# EAGLE board CT_schematic (EAGLE 7.6.0)

Size 100 x 80 mm. Coordinates in mm from the lower left corner, seen from the top.
Outline: 0,0 100,0 100,80 0,80 0,0
Copper layers (1*16): Top 0.035mm / dielectric 1.5mm / Bottom 0.035mm
Design rules "default": minimum track width 10mil, minimum drill 24mil, track to track 8mil, track to pad 8mil, pad to pad 8mil, via to via 8mil, smd to smd 8mil, copper to edge 40mil, drill to drill 8mil, minimum pad ring 10mil, minimum via ring 8mil, stop-mask expansion 4mil, vias tented up to drill 0mil, thermal gap 10mil

## Footprints (pad centres in the part's own frame; a part is rotated, then mirrored left to right if it is on the bottom)
C0603 = smd 0.8 x 0.8: 1 -0.762,0; 2 0.762,0
C0402 = smd 0.5 x 0.5: 1 -0.508,0; 2 0.508,0
C0805 = smd 1.2 x 1.3: 1 -1.016,0; 2 1.016,0
C1206 = smd 1.3 x 1.6: 1 -1.524,0; 2 1.524,0
C1210 = smd 1.2 x 2.5: 1 -1.524,0; 2 1.524,0
EXV-9H = smd 3.505 x 1.676: 1 -2.857,0; 2 2.857,0
L0603 = smd 0.8 x 0.8: 1 -0.762,0; 2 0.762,0
PJ-037B_PACKAGE = drill 3.7 square: 1 12,0 | drill 3.2 square: 2 6,0
R0603 = smd 0.8 x 0.8: 1 -0.762,0; 2 0.762,0
UFQFPN48 = smd 0.559 x 0.305: 1 -3.375,2.751; 2 -3.375,2.251; 3 -3.375,1.75; 4 -3.375,1.25; 5 -3.375,0.75; 6 -3.375,0.25; 7 -3.375,-0.25; 8 -3.375,-0.75; 9 -3.375,-1.25; 10 -3.375,-1.75; 11 -3.375,-2.251; 12 -3.375,-2.751; 25 3.375,-2.751; 26 3.375,-2.251; 27 3.375,-1.75; 28 3.375,-1.25; 29 3.375,-0.75; 30 3.375,-0.25; 31 3.375,0.25; 32 3.375,0.75; 33 3.375,1.25; 34 3.375,1.75; 35 3.375,2.251; 36 3.375,2.751 | smd 0.305 x 0.559: 13 -2.751,-3.375; 14 -2.251,-3.375; 15 -1.75,-3.375; 16 -1.25,-3.375; 17 -0.75,-3.375; 18 -0.25,-3.375; 19 0.25,-3.375; 20 0.75,-3.375; 21 1.25,-3.375; 22 1.75,-3.375; 23 2.251,-3.375; 24 2.751,-3.375; 37 2.751,3.375; 38 2.251,3.375; 39 1.75,3.375; 40 1.25,3.375; 41 0.75,3.375; 42 0.25,3.375; 43 -0.25,3.375; 44 -0.75,3.375; 45 -1.25,3.375; 46 -1.75,3.375; 47 -2.251,3.375; 48 -2.751,3.375 | smd 5.588 x 5.588: 49 0,0
M41T65_QFN-16 = smd 0.775 x 0.305: 1 -1.387,0.75; 2 -1.387,0.25; 3 -1.387,-0.25; 4 -1.387,-0.75; 9 1.387,-0.75; 10 1.387,-0.25; 11 1.387,0.25; 12 1.387,0.75 | smd 0.305 x 0.775: 5 -0.75,-1.387; 6 -0.25,-1.387; 7 0.25,-1.387; 8 0.75,-1.387; 13 0.75,1.387; 14 0.25,1.387; 15 -0.25,1.387; 16 -0.75,1.387 | smd 1.6 x 1.6: 17 0,0
SOIC-8 = smd 1.6 x 0.6: 1 -2.7,1.905 | smd 1.55 x 0.6: 2 -2.7,0.635; 3 -2.7,-0.635; 4 -2.7,-1.905; 5 2.7,-1.905; 6 2.7,-0.635; 7 2.7,0.635; 8 2.7,1.905
QFN-32 = smd 0.6 x 0.3: 1 -2.3,1.75; 2 -2.3,1.25; 3 -2.3,0.75; 4 -2.3,0.25; 5 -2.3,-0.25; 6 -2.3,-0.75; 7 -2.3,-1.25; 8 -2.3,-1.75; 17 2.3,-1.75; 18 2.3,-1.25; 19 2.3,-0.75; 20 2.3,-0.25; 21 2.3,0.25; 22 2.3,0.75; 23 2.3,1.25; 24 2.3,1.75 | smd 0.3 x 0.6: 9 -1.75,-2.3; 10 -1.25,-2.3; 11 -0.75,-2.3; 12 -0.25,-2.3; 13 0.25,-2.3; 14 0.75,-2.3; 15 1.25,-2.3; 16 1.75,-2.3; 25 1.75,2.3; 26 1.25,2.3; 27 0.75,2.3; 28 0.25,2.3; 29 -0.25,2.3; 30 -0.75,2.3; 31 -1.25,2.3; 32 -1.75,2.3 | smd 3.2 x 3.2: EXP 0,0
SJ-43515TS-SMT-TR = smd 2.2 x 3: 1 0.6,-7.4; 4 3.4,-7.4 | smd 3 x 3: 2 12.8,-7.4; 5 17,-3 | smd 2 x 3: 3 5.3,0; 6 2.5,0 | drill 1.8: P$7 4.5,-3.69; P$8 11.54,-3.69
WM-64PC = drill 0.6 pad 1: 1 -1,0.95; 2 -1,-0.95
SMD-8 = smd 0.72 x 0.6: 1 -1.45,-0.7; 2 -0.485,-0.7; 3 0.485,-0.7; 4 1.455,-0.7; 5 1.455,0.7; 6 0.485,0.7; 7 -0.485,0.7; 8 -1.455,0.7
QFN65P400X400X100-17N = smd 1.016 x 0.356: 1 -1.803,0.965; 2 -1.803,0.33; 3 -1.803,-0.33; 4 -1.803,-0.965; 9 1.803,-0.965; 10 1.803,-0.33; 11 1.803,0.33; 12 1.803,0.965 | smd 0.356 x 1.016: 5 -0.965,-1.803; 6 -0.33,-1.803; 7 0.33,-1.803; 8 0.965,-1.803; 13 0.965,1.803; 14 0.33,1.803; 15 -0.33,1.803; 16 -0.965,1.803 | smd 2.108 x 2.108: 17 0,0
HTSS-105-01-G-D = drill 1 pad 1.8 square: 1 0,0 | drill 1 pad 1.8: 2 0,2.54; 3 2.54,0; 4 2.54,2.54; 5 5.08,0; 6 5.08,2.54; 7 7.62,0; 8 7.62,2.54; 9 10.16,0; 10 10.16,2.54
ABS07-32.768KHZ-7-T = smd 1.1 x 2.4: 1 -2.5,0; 2 0,0
ABLS-25.000MHZ-B2F-T = smd 5.6 x 2.8: 1 -3.81,0; 2 5.69,0
ASEK = smd 1.4 x 1: 1 -1.1,-0.8; 2 1.1,-0.8; 3 1.1,0.8; 4 -1.1,0.8
ASFL1 = smd 1.7 x 1.5: 1 -1.27,-1.1; 2 1.27,-1.1; 3 1.27,1.1; 4 -1.27,1.1
WSON-8 = smd 0.3 x 0.6: 1 -0.75,0; 2 0.05,0; 3 0.85,0; 4 1.65,0; 5 1.65,3.8; 6 0.85,3.8; 7 0.05,3.8; 8 -0.75,3.8 | smd 3 x 2.6: PAD 0.45,1.9
SON-6 = smd 0.55 x 0.3: 1 -0.355,0.5 | smd 0.52 x 0.3: 2 -0.37,0; 3 -0.37,-0.5; 4 0.37,-0.5; 5 0.37,0; 6 0.37,0.5
SW_4-1437565-2 = smd 1.4 x 2.1: 1 -2.23,4.55; 2 -2.23,-4.55; 3 2.23,4.55; 4 2.23,-4.55
LGM67K-G1J2-24-Z = smd 0.8 x 1.4: A -2,0; C 0,0
NC7SZ125M5X = smd 1.3 x 0.7: 1 -1.3,0.95; 2 -1.3,0; 3 -1.3,-0.95; 4 1.3,-0.95; 5 1.3,0.95

## Placement (x,y rotation side)
C1  1e-06  [C0603]  -52.07,78.74 0 top  (outside the outline)
C2  1e-07  [C0603]  -55.88,78.74 0 top  (outside the outline)
C3  1e-07  [C0603]  -59.69,78.74 0 top  (outside the outline)
C4  1e-07  [C0603]  -63.5,78.74 0 top  (outside the outline)
C5  1e-07  [C0603]  -67.31,78.74 0 top  (outside the outline)
C6  1e-07  [C0603]  -71.12,78.74 0 top  (outside the outline)
C7  4.7e-06  [C0603]  -44.45,78.74 0 top  (outside the outline)
C8  2.2e-06  [C0603]  -48.26,78.74 0 top  (outside the outline)
C9  1e-08  [C0603]  -74.93,78.74 0 top  (outside the outline)
C10  1e-06  [C0603]  -78.74,78.74 0 top  (outside the outline)
C11  1e-11  [C0402]  -49.53,88.9 0 top  (outside the outline)
C12  1e-11  [C0402]  -53.34,88.9 0 top  (outside the outline)
C13  4.7e-06  [C0805]  -27.94,72.39 0 top  (outside the outline)
C14  1e-08  [C0402]  -57.15,88.9 0 top  (outside the outline)
C15  1e-06  [C0603]  -82.55,78.74 0 top  (outside the outline)
C16  1e-06  [C0603]  -15.24,83.82 0 top  (outside the outline)
C17  1e-06  [C0603]  -19.05,83.82 0 top  (outside the outline)
C18  1e-06  [C0603]  -22.86,83.82 0 top  (outside the outline)
C19  1e-06  [C0603]  -26.67,83.82 0 top  (outside the outline)
C20  1e-06  [C0603]  -30.48,83.82 0 top  (outside the outline)
C21  1e-06  [C0603]  -34.29,83.82 0 top  (outside the outline)
C22  1e-07  [C0402]  -60.96,88.9 0 top  (outside the outline)
C23  1e-07  [C0402]  -64.77,88.9 0 top  (outside the outline)
C24  1e-07  [C0402]  -68.58,88.9 0 top  (outside the outline)
C25  1e-07  [C0402]  -72.39,88.9 0 top  (outside the outline)
C26  1e-06  [C0603]  -38.1,83.82 0 top  (outside the outline)
C27  1e-06  [C0603]  -41.91,83.82 0 top  (outside the outline)
C28  1e-06  [C0603]  -45.72,83.82 0 top  (outside the outline)
C29  1e-07  [C0402]  -76.2,88.9 0 top  (outside the outline)
C30  1e-06  [C0603]  -49.53,83.82 0 top  (outside the outline)
C31  1e-08  [C0402]  -80.01,88.9 0 top  (outside the outline)
C32  1e-08  [C0402]  -83.82,88.9 0 top  (outside the outline)
C33  1e-08  [C0402]  -15.24,93.98 0 top  (outside the outline)
C34  1e-05  [C1206]  -76.2,64.77 0 top  (outside the outline)
C35  1e-05  [C0805]  -33.02,72.39 0 top  (outside the outline)
C36  1e-08  [C0402]  -19.05,93.98 0 top  (outside the outline)
C37  1e-05  [C1206]  -82.55,64.77 0 top  (outside the outline)
C38  1e-05  [C1210]  -69.85,64.77 0 top  (outside the outline)
C39  1e-07  [C0402]  -22.86,93.98 0 top  (outside the outline)
C40  0.0001  [EXV-9H]  -57.15,57.15 0 top  (outside the outline)
C41  0.0001  [EXV-9H]  -68.58,57.15 0 top  (outside the outline)
C42  1e-08  [C0402]  -26.67,93.98 0 top  (outside the outline)
F1  240.0  [L0603]  -53.34,83.82 0 top  (outside the outline)
J1  PJ-037B  [PJ-037B_PACKAGE]  -83.82,22.86 0 top  (outside the outline)
R1  10000.0  [R0603]  -58.42,72.39 0 top  (outside the outline)
R2  1000.0  [R0603]  -57.15,83.82 0 top  (outside the outline)
R3  1600.5  [R0603]  -60.96,83.82 0 top  (outside the outline)
R4  4700.0  [R0603]  -64.77,83.82 0 top  (outside the outline)
R5  2200.0  [R0603]  -68.58,83.82 0 top  (outside the outline)
R6  2200.0  [R0603]  -72.39,83.82 0 top  (outside the outline)
R7  2200.0  [R0603]  -76.2,83.82 0 top  (outside the outline)
R8  2200.0  [R0603]  -80.01,83.82 0 top  (outside the outline)
R9  2200.0  [R0603]  -83.82,83.82 0 top  (outside the outline)
R10  2200.0  [R0603]  -15.24,88.9 0 top  (outside the outline)
R11  10000.0  [R0603]  -63.5,72.39 0 top  (outside the outline)
R12  10000.0  [R0603]  -68.58,72.39 0 top  (outside the outline)
R13  10000.0  [R0603]  -73.66,72.39 0 top  (outside the outline)
R14  10000.0  [R0603]  -78.74,72.39 0 top  (outside the outline)
R15  10000.0  [R0603]  -83.82,72.39 0 top  (outside the outline)
R16  10000.0  [R0603]  -15.24,78.74 0 top  (outside the outline)
R17  1270.0  [R0603]  -19.05,88.9 0 top  (outside the outline)
R18  1270.0  [R0603]  -22.86,88.9 0 top  (outside the outline)
R19  10000.0  [R0603]  -20.32,78.74 0 top  (outside the outline)
R20  22.0  [R0603]  -26.67,88.9 0 top  (outside the outline)
R21  10000.0  [R0603]  -25.4,78.74 0 top  (outside the outline)
R22  10000.0  [R0603]  -30.48,78.74 0 top  (outside the outline)
R23  100000.0  [R0603]  -38.1,72.39 0 top  (outside the outline)
R24  200.0  [R0603]  -30.48,88.9 0 top  (outside the outline)
R25  1000.0  [R0603]  -34.29,88.9 0 top  (outside the outline)
R26  100000.0  [R0603]  -43.18,72.39 0 top  (outside the outline)
R27  2231.0  [R0603]  -38.1,88.9 0 top  (outside the outline)
R28  1000.0  [R0603]  -41.91,88.9 0 top  (outside the outline)
R29  10000.0  [R0603]  -35.56,78.74 0 top  (outside the outline)
R30  10000.0  [R0603]  -40.64,78.74 0 top  (outside the outline)
R31  9100.0  [R0603]  -45.72,88.9 0 top  (outside the outline)
R32  680000.0  [R0603]  -48.26,72.39 0 top  (outside the outline)
R33  120000.0  [R0603]  -53.34,72.39 0 top  (outside the outline)
U1  STM32F401CEU6  [UFQFPN48]  -72.39,46.99 0 top  (outside the outline)
U2  M41T65Q6F  [M41T65_QFN-16]  -31.75,93.98 0 top  (outside the outline)
U3  24AA1025T-I/SN  [SOIC-8]  -22.86,48.26 0 top  (outside the outline)
U4  SGTL5000XNAA3  [QFN-32]  -53.34,35.56 0 top  (outside the outline)
U5  SJ-43515TS-SMT-TR  [SJ-43515TS-SMT-TR]  -66.04,10.16 0 top  (outside the outline)
U6  SJ-43515TS-SMT-TR  [SJ-43515TS-SMT-TR]  -39.37,25.4 0 top  (outside the outline)
U7  SJ-43515TS-SMT-TR  [SJ-43515TS-SMT-TR]  -67.31,25.4 0 top  (outside the outline)
U8  WM-64PCT  [WM-64PC]  -39.37,35.56 0 top  (outside the outline)
U9  TMD27711  [SMD-8]  -22.86,72.39 0 top  (outside the outline)
U10  TSC2008TRGVRQ1  [QFN65P400X400X100-17N]  -35.56,7.62 0 top  (outside the outline)
U11  HTSS-105-01-G-D  [HTSS-105-01-G-D]  -73.66,34.29 0 top  (outside the outline)
U12  ABS07-32.768KHZ-7-T  [ABS07-32.768KHZ-7-T]  -49.53,66.04 0 top  (outside the outline)
U13  ABLS-25.000MHZ-B2F-T  [ABLS-25.000MHZ-B2F-T]  -26.67,66.04 0 top  (outside the outline)
U14  ASEK-32.768KHz-ECST  [ASEK]  -48.26,57.15 0 top  (outside the outline)
U15  ASFL-24.57MHZ-NCS  [ASFL1]  -27.94,57.15 0 top  (outside the outline)
U16  LP3878SDX-ADJ/NOPB  [WSON-8]  -44.45,45.72 0 top  (outside the outline)
U17  LP3878SDX-ADJ/NOPB  [WSON-8]  -64.77,45.72 0 top  (outside the outline)
U18  TPS3895ADRYR  [SON-6]  -36.83,92.71 0 top  (outside the outline)
U19  4-1437565-2  [SW_4-1437565-2]  -27.94,36.83 0 top  (outside the outline)
U20  Q65110A2395  [LGM67K-G1J2-24-Z]  -58.42,64.77 0 top  (outside the outline)
U21  nc7sz125m5x  [NC7SZ125M5X]  -15.24,72.39 0 top  (outside the outline)

## Library data of the parts
C1-C42 F1 J1 R1-R33 U1-U21 = circuit_tree

## Nets
CLK_CRYSTAL_U1_5: C11.1 U1.5 U13.1
CLK_CRYSTAL_U1_6: C12.1 U1.6 U13.2
CLK_CRYSTAL_U2_1: U2.1 U12.1
CLK_CRYSTAL_U2_2: U2.2 U12.2
CLK_U1_3: U1.3 U14.3
CLK_U4_21: U4.21 U15.3
GND: C1.2 C2.2 C3.2 C4.2 C5.2 C6.2 C7.2 C8.2 C9.2 C10.2 C11.2 C12.2 C13.2 C14.2 C22.2 C23.2 C24.2 C25.2 C26.2 C27.2 C28.2 C29.2 C30.2 C31.2 C32.2 C33.2 C34.2 C35.2 C36.2 C37.2 C38.2 C39.2 C40.2 C41.2 C42.2 J1.2 R2.2 R11.2 R18.2 R25.2 R28.2 R31.2 R33.2 U1.8 U1.23 U1.35 U1.47 U1.49 U2.3 U2.5 U2.17 U3.4 U3.7 U4.1 U4.3 U4.7 U4.EXP U6.1 U7.1 U8.2 U9.3 U10.10 U10.12 U10.17 U11.9 U14.2 U15.2 U16.3 U16.PAD U17.3 U17.PAD U18.2 U20.C U21.1 U21.3
NET_U1_7: R4.1 U1.7 U21.4
NET_U1_9: C9.1 C10.1 F1.1 U1.9
NET_U1_21: R7.1 U1.21 U2.10
NET_U1_22: C8.1 U1.22
NET_U1_29: R9.1 U1.29 U3.6
NET_U1_39: R8.1 U1.39 U2.9
NET_U1_40: R10.1 U1.40 U3.5
NET_U1_42: R5.1 U1.42 U9.2
NET_U1_43: R6.1 U1.43 U9.8
NET_U1_44: R11.1 U1.44
NET_U1_45: R3.1 U1.45 U20.A
NET_U1_46: R1.1 U1.46 U19.3 U19.4
NET_U2_4: R12.1 U2.4
NET_U2_11: R13.1 U2.11
NET_U3_1: R15.1 U3.1
NET_U3_2: R16.1 U3.2
NET_U3_3: R14.1 U3.3
NET_U4_10: C25.1 U4.10
NET_U4_29: R17.1 U4.29
NET_U4_31: R18.1 U4.31
NET_U5_1: U4.4 U5.1
NET_U5_2: U4.2 U5.2
NET_U5_5: U4.6 U5.5
NET_U6_2: C16.1 U6.2
NET_U6_5: C15.1 U6.5
NET_U6_11: C16.2
NET_U6_12: C15.2
NET_U7_2: C18.1 C19.1 U7.2
NET_U7_5: C17.1 U7.5
NET_U7_13: C18.2 C19.2
NET_U7_14: C17.2
NET_U8_1: C20.1 C21.1 C26.1 U4.16 U8.1
NET_U8_15: C20.2 C21.2
NET_U9_4: C28.1 R20.1 U9.4
NET_U9_5: U9.5
NET_U9_6: U9.6
NET_U9_7: R19.1 U9.7
NET_U10_15: R22.1 U10.15
NET_U11_3: U10.7 U11.3
NET_U11_4: U10.9 U11.4
NET_U11_5: U10.6 U11.5
NET_U11_6: U10.8 U11.6
NET_U16_1: C33.1 U16.1
NET_U16_6: R24.2 R25.1 U16.6
NET_U16_8: R23.1 U16.8
NET_U17_1: C36.1 U17.1
NET_U17_6: R27.2 R28.1 U17.6
NET_U17_8: R26.1 U17.8
NET_U18_1: R30.1 R31.1 U18.1
NET_U18_3: R32.2 R33.1 U18.3
NET_U18_4: R29.1 U18.4 U21.2
NET_U19_1: R2.1 U19.1 U19.2
PROC_I2S2_CK: U1.26 U4.24
PROC_I2S2_EXT_SD: U1.27 U4.25
PROC_I2S2_SD: U1.28 U4.26
PROC_I2S2_WS: U1.25 U4.23
PROC_SPI1_MISO: U1.16 U10.16
PROC_SPI1_MOSI: U1.17 U10.2
PROC_SPI1_NSS: R21.1 U1.14 U10.3
PROC_SPI1_SCK: U1.15 U10.4
VCC_S1_5V9: C34.1 C37.1 C40.1 C41.1 J1.1 R23.2 R26.2 U16.4 U17.4
VCC_TIER1_1V2: C22.1 C35.1 R24.1 U4.30 U16.5
VCC_TIER1_3V3: C1.1 C2.1 C3.1 C4.1 C5.1 C6.1 C7.1 C13.1 C14.1 C23.1 C24.1 C27.1 C29.1 C30.1 C31.1 C32.1 C38.1 C39.1 C42.1 F1.2 R1.2 R3.2 R4.2 R5.2 R6.2 R7.2 R8.2 R9.2 R10.2 R12.2 R13.2 R14.2 R15.2 R16.2 R17.2 R19.2 R20.2 R21.2 R22.2 R27.1 R29.2 R30.2 R32.1 U1.1 U1.24 U1.36 U1.48 U2.14 U3.8 U4.5 U4.20 U9.1 U10.5 U14.4 U15.4 U17.5 U18.6 U21.5

## Tracks (layer width: path | path; a pad name or v marks a point on that pad's centre or on a via)
CLK_CRYSTAL_U1_5  (2 unrouted)
CLK_CRYSTAL_U1_6  (2 unrouted)
CLK_CRYSTAL_U2_1  (1 unrouted)
CLK_CRYSTAL_U2_2  (1 unrouted)
CLK_U1_3  (1 unrouted)
CLK_U4_21  (1 unrouted)
GND  (74 unrouted)
NET_U1_7  (2 unrouted)
NET_U1_9  (3 unrouted)
NET_U1_21  (2 unrouted)
NET_U1_22  (1 unrouted)
NET_U1_29  (2 unrouted)
NET_U1_39  (2 unrouted)
NET_U1_40  (2 unrouted)
NET_U1_42  (2 unrouted)
NET_U1_43  (2 unrouted)
NET_U1_44  (1 unrouted)
NET_U1_45  (2 unrouted)
NET_U1_46  (3 unrouted)
NET_U2_4  (1 unrouted)
NET_U2_11  (1 unrouted)
NET_U3_1  (1 unrouted)
NET_U3_2  (1 unrouted)
NET_U3_3  (1 unrouted)
NET_U4_10  (1 unrouted)
NET_U4_29  (1 unrouted)
NET_U4_31  (1 unrouted)
NET_U5_1  (1 unrouted)
NET_U5_2  (1 unrouted)
NET_U5_5  (1 unrouted)
NET_U6_2  (1 unrouted)
NET_U6_5  (1 unrouted)
NET_U7_2  (2 unrouted)
NET_U7_5  (1 unrouted)
NET_U7_13  (1 unrouted)
NET_U8_1  (4 unrouted)
NET_U8_15  (1 unrouted)
NET_U9_4  (2 unrouted)
NET_U9_7  (1 unrouted)
NET_U10_15  (1 unrouted)
NET_U11_3  (1 unrouted)
NET_U11_4  (1 unrouted)
NET_U11_5  (1 unrouted)
NET_U11_6  (1 unrouted)
NET_U16_1  (1 unrouted)
NET_U16_6  (2 unrouted)
NET_U16_8  (1 unrouted)
NET_U17_1  (1 unrouted)
NET_U17_6  (2 unrouted)
NET_U17_8  (1 unrouted)
NET_U18_1  (2 unrouted)
NET_U18_3  (2 unrouted)
NET_U18_4  (2 unrouted)
NET_U19_1  (2 unrouted)
PROC_I2S2_CK  (1 unrouted)
PROC_I2S2_EXT_SD  (1 unrouted)
PROC_I2S2_SD  (1 unrouted)
PROC_I2S2_WS  (1 unrouted)
PROC_SPI1_MISO  (1 unrouted)
PROC_SPI1_MOSI  (1 unrouted)
PROC_SPI1_NSS  (2 unrouted)
PROC_SPI1_SCK  (1 unrouted)
VCC_S1_5V9  (8 unrouted)
VCC_TIER1_1V2  (4 unrouted)
VCC_TIER1_3V3  (57 unrouted)